# EAGLE board Arduino_Eth08d_MU (EAGLE 5.11)
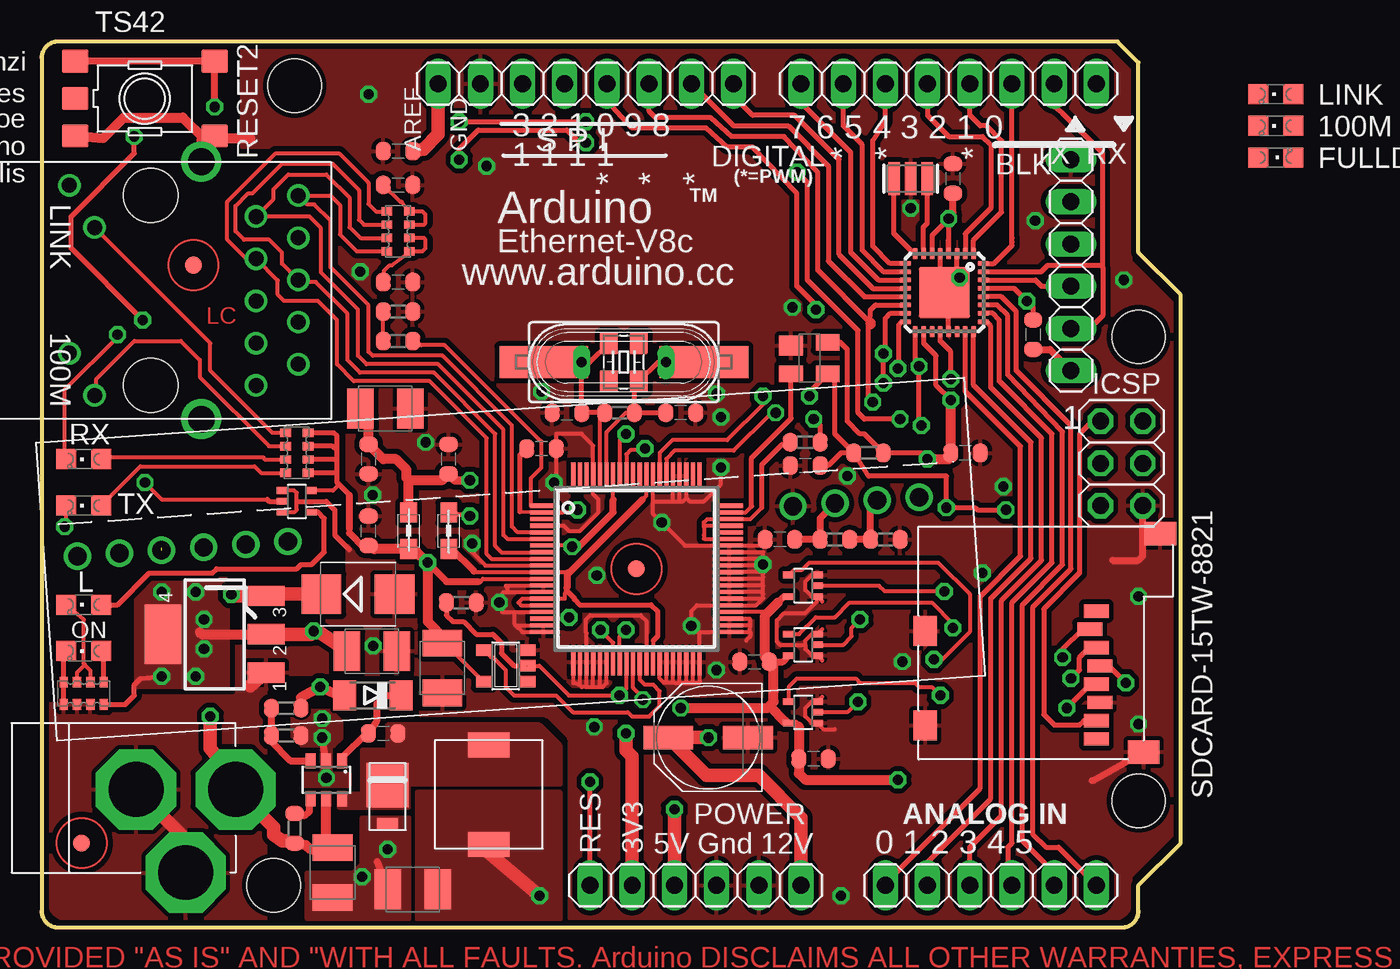
[diagram p0: board, top side]
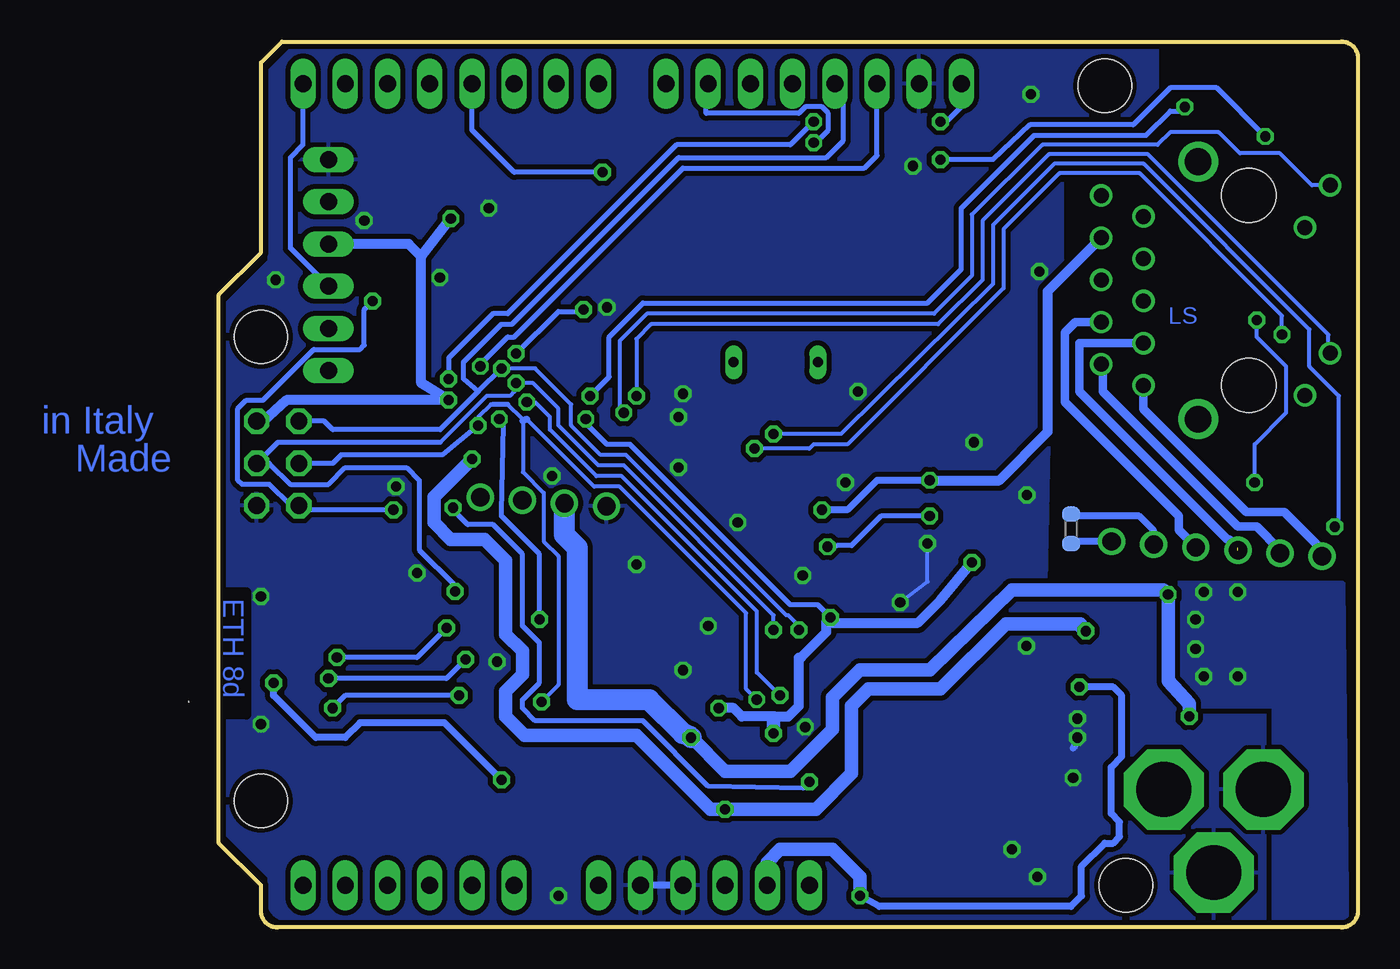
[diagram p1: board, bottom side, seen from below]

Size 68.58 x 53.34 mm. Coordinates in mm from the lower left corner, seen from the top.
Outline: 66.04,2.54 68.58,5.08 68.58,38.1 66.04,40.64 66.04,52.07 64.77,53.34 1,53.34 arc90 0,52.34 0,1 arc90 1,0 65.04,0 arc90 66.04,1 66.04,2.54
Copper layers (1*16): Top 0.035mm / dielectric 1.5mm / Bottom 0.035mm
Design rules "ArduinoDEF": minimum track width 6mil, minimum drill 12mil, track to track 5mil, track to pad 5mil, pad to pad 5mil, via to via 5mil, smd to smd 4mil, copper to edge 10mil, drill to drill 6mil, minimum pad ring 8mil, minimum via ring 8mil, stop-mask expansion 0mil, vias tented up to drill 0mil, thermal gap 10mil
Net classes: 0 default: width 0.152 mm, drill 0.61 mm, clearance 0.152 mm; 1 power: width 0.152 mm, drill 0.61 mm, clearance 0.152 mm; 2 VIN: width 0.61 mm, drill 0.61 mm, clearance 0.305 mm
Holes 3.2 mm at 66.04,35.56 66.04,7.62 15.24,50.67 13.97,2.54
bRestrict: area 66.9,12.8 to 69,20.2

## Footprints (pad centres in the part's own frame; a part is rotated, then mirrored left to right if it is on the bottom)
CHIPLED_0805 = smd 1.2 x 1.2: A 0,-1.05; C 0,1.05
C0603-ROUND = smd 0.898 x 1.1: 1 -0.889,0; 2 0.889,0
SMC_B = smd 1.6 x 2.4: + -1.5,0; - 1.5,0
PANASONIC_D = smd 3 x 1.4: + 2.4,0; - -2.4,0
SMB = smd 2.4 x 2.4: A 2.2,0; C -2.2,0
MINIMELF = smd 1.4 x 1.8: A 1.7,0; C -1.7,0
DO220AAL = smd 2.667 x 2.54: P$1 -0.7,0 | smd 0.762 x 1.27: P$2 1.65,0
SOT143 = smd 1.2 x 1.44: 1 -0.75,-1.1 | smd 1 x 1.44: 2 0.95,-1.1; 3 0.95,1.1; 4 -0.95,1.1
MLF32 = smd 0.7 x 0.3: 1 -2.35,1.75; 2 -2.35,1.25; 3 -2.35,0.75; 4 -2.35,0.25; 5 -2.35,-0.25; 6 -2.35,-0.75; 7 -2.35,-1.25; 8 -2.35,-1.75; 17 2.35,-1.75; 18 2.35,-1.25; 19 2.35,-0.75; 20 2.35,-0.25; 21 2.35,0.25; 22 2.35,0.75; 23 2.35,1.25; 24 2.35,1.75 | smd 0.3 x 0.7: 9 -1.75,-2.35; 10 -1.25,-2.35; 11 -0.75,-2.35; 12 -0.25,-2.35; 13 0.25,-2.35; 14 0.75,-2.35; 15 1.25,-2.35; 16 1.75,-2.35; 25 1.75,2.35; 26 1.25,2.35; 27 0.75,2.35; 28 0.25,2.35; 29 -0.25,2.35; 30 -0.75,2.35; 31 -1.25,2.35; 32 -1.75,2.35 | smd 3.1 x 3.1: PAD 0,0
SC70-5 = smd 0.4 x 0.7: 1 -0.65,-0.85; 2 0,-0.85; 3 0.65,-0.85; 4 0.65,0.85; 5 -0.65,0.85
SOT223 = smd 1.219 x 2.235: 1 -2.311,-3.099; 2 0,-3.099; 3 2.311,-3.099 | smd 3.6 x 2.2: 4 0,3.099
SOT23-6 = smd 0.6 x 0.9: 1 -0.95,-1.15; 2 0,-1.15; 3 0.95,-1.15; 4 0.95,1.15; 5 0,1.15; 6 -0.95,1.15
SQFP-S-10X10-80 = smd 0.25 x 1.6: 1 -3.8,-5.6; 2 -3.4,-5.6; 3 -3,-5.6; 4 -2.6,-5.6; 5 -2.2,-5.6; 6 -1.8,-5.6; 7 -1.4,-5.6; 8 -1,-5.6; 9 -0.6,-5.6; 10 -0.2,-5.6; 11 0.2,-5.6; 12 0.6,-5.6; 13 1,-5.6; 14 1.4,-5.6; 15 1.8,-5.6; 16 2.2,-5.6; 17 2.6,-5.6; 18 3,-5.6; 19 3.4,-5.6; 20 3.8,-5.6; 41 3.8,5.6; 42 3.4,5.6; 43 3,5.6; 44 2.6,5.6; 45 2.2,5.6; 46 1.8,5.6; 47 1.4,5.6; 48 1,5.6; 49 0.6,5.6; 50 0.2,5.6; 51 -0.2,5.6; 52 -0.6,5.6; 53 -1,5.6; 54 -1.4,5.6; 55 -1.8,5.6; 56 -2.2,5.6; 57 -2.6,5.6; 58 -3,5.6; 59 -3.4,5.6; 60 -3.8,5.6 | smd 1.6 x 0.25: 21 5.6,-3.8; 22 5.6,-3.4; 23 5.6,-3; 24 5.6,-2.6; 25 5.6,-2.2; 26 5.6,-1.8; 27 5.6,-1.4; 28 5.6,-1; 29 5.6,-0.6; 30 5.6,-0.2; 31 5.6,0.2; 32 5.6,0.6; 33 5.6,1; 34 5.6,1.4; 35 5.6,1.8; 36 5.6,2.2; 37 5.6,2.6; 38 5.6,3; 39 5.6,3.4; 40 5.6,3.8; 61 -5.6,3.8; 62 -5.6,3.4; 63 -5.6,3; 64 -5.6,2.6; 65 -5.6,2.2; 66 -5.6,1.8; 67 -5.6,1.4; 68 -5.6,1; 69 -5.6,0.6; 70 -5.6,0.2; 71 -5.6,-0.2; 72 -5.6,-0.6; 73 -5.6,-1; 74 -5.6,-1.4; 75 -5.6,-1.8; 76 -5.6,-2.2; 77 -5.6,-2.6; 78 -5.6,-3; 79 -5.6,-3.4; 80 -5.6,-3.8
SOT23-5 = smd 0.69 x 0.99: 1 -0.95,-1.29; 2 0,-1.29; 3 0.95,-1.29; 4 0.95,1.3; 5 -0.95,1.3
2X03 = drill 1.016 octagon: 1 -2.54,-1.27; 2 -2.54,1.27; 3 0,-1.27; 4 0,1.27; 5 2.54,-1.27; 6 2.54,1.27
1X08 = drill 1.016 long: 1 -8.89,0; 2 -6.35,0; 3 -3.81,0; 4 -1.27,0; 5 1.27,0; 6 3.81,0; 7 6.35,0; 8 8.89,0
1X06 = drill 1.016 long: 1 -6.35,0; 2 -3.81,0; 3 -1.27,0; 4 1.27,0; 5 3.81,0; 6 6.35,0
SRR0604 = smd 1.5 x 2.5: P$1 3,0; P$2 -3,0
0805 = smd 1.2 x 1: 1 -1.1,0; 2 1.1,0
QS = drill 0.61 long: 1 -2.54,0; 2 2.54,0
HC49UP = smd 5.334 x 1.93: 1 -4.826,0; 2 4.826,0
CRYSTAL3.2X2.5 = smd 1.3 x 1.1: 1 -1.15,-0.9; 2 1.15,0.9; 3 1.15,-0.9; 4 -1.15,0.9
R0603-ROUND = smd 0.898 x 1.1: 1 -0.889,0; 2 0.889,0
TS42 = smd 1.6 x 1.4: 1 -4.2,2.25; 2 4.2,2.25; 3 -4.2,-2.25; 4 4.2,-2.25; 5 -4.2,0
CAY16 = smd 0.5 x 0.65: 1 -1.2,-0.675; 2 -0.4,-0.675; 3 0.4,-0.675; 4 1.2,-0.675; 5 1.2,0.675; 6 0.4,0.675; 7 -0.4,0.675; 8 -1.2,0.675
POE-RJ45 = drill 1.6 round: CH1 13.94,7.75; CH2 13.94,-7.75 | drill 0.9 round: L1 7.51,-6.325; L2 5.99,-3.785; L3 7.51,3.785; L4 5.99,6.325; R1 19.77,5.715; R2 17.23,4.445; R3 19.77,3.175; R4 17.23,1.905; R5 19.77,0.635; R6 17.23,-0.635; R7 19.77,-1.905; R8 17.23,-3.175; R9 19.77,-4.445; R10 17.23,-5.715 | hole 3.25: 10.89,5.715; 10.89,-5.715
FIDUCIA-MOUNT = smd 1.016 x 1.016: P$1 0,0
DC-21MM = drill 3.302 pad 4.826 octagon: 1 -5.08,-3.353; 2 -0.076,-6.35; 3 -0.076,-0.356
SDCARD-15TW-8821 = smd 0.8 x 1.5: 1 0,0; 2 1.1,-0.4; 3 2.2,0; 4 3.3,0.2; 5 4.4,0; 6 5.5,0.2; 7 6.6,0; 8 7.7,0 | smd 1.4 x 1.9: GND1 -4.66,3.85; GND2 8.49,2.85 | smd 1.8 x 1.4: GND3 1.19,-10.3; GND4 6.89,-10.3
RESONATOR = smd 0.7 x 2: 1 -1,0; 2 0,0; 3 1,0
AG9000 = drill 1.1 round: P$1 0,0; P$2 2.54,0; P$3 5.08,0; P$4 7.62,0; P$5 10.16,0; P$6 12.7,0; P$7 43.18,0; P$8 45.72,0; P$9 48.26,0; P$10 50.8,0

## Placement (x,y rotation side)
100M  Green  [CHIPLED_0805]  74.3,48.26 90 top  (outside the outline)
C1  100n  [C0603-ROUND]  30.1,28.83 0 top
C2  100n  [C0603-ROUND]  21.46,44.7 180 top
C3  100n  [C0603-ROUND]  45.97,27.81 180 top
C4  100n  [C0603-ROUND]  21.46,38.86 180 top
C5  100n  [C0603-ROUND]  21.46,46.74 180 top
C6  100n  [C0603-ROUND]  55.63,28.57 0 top
C7  100n  [C0603-ROUND]  54.86,45.09 90 top
C8  10u  [SMC_B]  19.89,16.64 0 top
C9  22p  [C0603-ROUND]  31.62,30.99 180 top
C10  10n  [C0603-ROUND]  20.57,11.68 0 top
C11  10u  [SMC_B]  17.53,3.3 270 top
C12  22p  [C0603-ROUND]  38.48,30.99 0 top
C13  10u  [SMC_B]  24.13,15.62 270 top
C14  470u  [PANASONIC_D]  40.13,11.43 180 top
C15  1u  [C0603-ROUND]  44.45,23.37 0 top
C16  100n  [C0603-ROUND]  42.93,16 180 top
C17  100n  [C0603-ROUND]  19.68,23.88 90 top
C18  10u  [SMC_B]  22.35,2.29 180 top
C19  10u  [SMC_B]  20.7,31.24 0 top
C20  100n  [C0603-ROUND]  19.68,28.19 270 top
C21  100n  [C0603-ROUND]  24.51,28.19 90 top
C22  1u  [C0603-ROUND]  46.48,10.16 0 top
C23  100n  [C0603-ROUND]  59.69,35.69 270 top
D1  M7  [SMB]  19.05,20.07 0 top
D2  4148  [MINIMELF]  19.94,13.97 180 top
D3  SS1P3L  [DO220AAL]  20.83,7.87 270 top
FULLD  [CHIPLED_0805]  74.3,46.35 270 top  (outside the outline)
IC1  CAT811TTBI-CT3  [SOT143]  46.23,34.29 270 top
IC2  ATMEGA328-20MU  [MLF32]  54.36,38.23 270 top
IC3  74LVC1G125DCK  [SC70-5]  15.37,25.65 270 top
IC4  MC33269ST-5  [SOT223]  10.41,17.65 90 top
IC5  LM2736Y  [SOT23-6]  17.14,8.89 180 top
IC6  W5100  [SQFP-S-10X10-80]  35.81,21.59 270 top
IC10  74LVC1G125DCK  [SC70-5]  45.85,20.57 90 top
IC11  74LVC1G125DCK  [SC70-5]  45.85,12.95 90 top
IC12  74LVC1G125DCK  [SC70-5]  45.85,17.02 90 top
IC13  74LVC1G14DBV  [SOT23-5]  27.94,15.75 90 top
ICSP  ICSP  [2X03]  65.02,27.94 270 top
J1  [1X08]  32.77,50.8 180 top
J2  [1X06]  57.15,2.54 0 top
J3  [1X08]  54.61,50.8 180 top
J4  [1X06]  61.98,39.88 270 top
L  Green  [CHIPLED_0805]  2.54,19.43 90 top
L2  4u7  [SRR0604]  26.92,8 90 top
L3  BLM21  [0805]  24.51,23.88 90 top
L4  BLM21  [0805]  22.1,23.88 270 top
LINK  Yellow  [CHIPLED_0805]  74.3,50.16 90 top  (outside the outline)
ON  Green  [CHIPLED_0805]  2.54,16.64 90 top
POWER  [1X06]  39.37,2.54 0 top
Q1  25MHz  [QS]  35.05,34.04 180 top
Q2  25MHz  [HC49UP]  35.05,34.04 0 top
Q3  25MHz KX-7  [CRYSTAL3.2X2.5]  35.05,34.04 90 top
R1  10k  [R0603-ROUND]  49.78,28.57 0 top
R2  300R 1%  [R0603-ROUND]  21.46,37.08 0 top
R3  12k 1%  [R0603-ROUND]  21.46,35.31 180 top
R4  1M  [R0603-ROUND]  34.8,30.99 0 top
R5  100k  [R0603-ROUND]  15.24,5.97 90 top
R6  16K5  [R0603-ROUND]  14.73,13.21 180 top
R7  10k  [R0603-ROUND]  14.73,11.56 0 top
R8  0R  [R0603-ROUND]  47.75,23.37 0 top
R9  N.M.  [R0603-ROUND]  17.27,24 270 bottom
R10  N.M.  [R0603-ROUND]  50.8,23.37 0 top
R11  10k  [R0603-ROUND]  25.27,19.56 180 top
R12  10k  [R0603-ROUND]  45.97,29.21 0 top
RESET2  TS42  [TS42]  6.22,49.91 0 top
RN1  1k  [CAY16]  2.54,14.1 0 top
RN2  49R9  [CAY16]  21.46,41.91 90 top
RN3  1k  [CAY16]  15.37,28.57 90 top
RX  Yellow  [CHIPLED_0805]  2.54,28.19 90 top
TX  Yellow  [CHIPLED_0805]  2.54,25.4 90 top
U$1  POE-RJ45  [POE-RJ45]  -4.32,38.35 0 top
U$2  FIDUCIALMOUNT  [FIDUCIA-MOUNT]  9.14,39.88 0 top
U$4  FIDUCIALMOUNT  [FIDUCIA-MOUNT]  35.81,21.59 0 top
U$5  FIDUCIALMOUNT  [FIDUCIA-MOUNT]  2.41,5.08 0 top
X1  DC21MMX  [DC-21MM]  5.33,8.38 90 top
X2  SDCARD-15TW-8821  [SDCARD-15TW-8821]  63.5,19.05 270 top
Y1  16Mhz  [RESONATOR]  52.32,45.09 0 top
ZZ1  AG9XX0  [AG9000]  2.16,22.35 4 top

## Library data of the parts
100M FULLD L LINK ON RX TX = led
C1-C7 C9 C10 C12 C15-C17 C20-C23 D3 IC1 IC5 IC6 L2 Q3 R1-R12 U$1 U$2 U$4 U$5 ZZ1 = SmartPrj
C8 C11 C13 C14 C18 C19 = rcl
D1 D2 = diode
IC2 = idii
IC3 IC10-IC12 = 74xx-little-us
IC4 = linear
IC13 = 74xx-little-de
ICSP J1-J4 POWER = pinhead
L3 L4 = wuerth-elektronik
Q1 = special
Q2 = crystal
RESET2 = st-mod v1.4
RN1-RN3 = resistor-dil
X1 = powersupply
X2 = st-mod v1.3
Y1 = Nano_MySMD2

## Nets
5-GND: RESET2.5
+1V8 [power]: IC6.11 IC6.15 IC6.16 IC6.33 IC6.69 L3.1
+1V8A [power]: IC6.7 IC6.74 L3.2
+3V3 [power]: C13.+ C16.1 C17.1 C18.+ C22.1 D2.A IC3.5 IC6.12 IC6.18 IC6.44 IC10.5 IC11.5 IC12.5 IC13.5 L2.P$2 L4.2 POWER.2 R6.1 R12.2 RN3.1 RN3.2 RN3.3 RN3.4 X2.4
+3V3A [power]: C1.1 C19.+ C20.1 C21.1 IC6.2 L4.1 U$1.R3
+5V [power]: C6.1 C7.1 C8.+ IC1.4 IC2.4 IC2.6 IC2.18 IC4.2 IC4.4 ICSP.2 J4.3 POWER.3 R1.2 RN1.4
AREF: C5.1 IC2.20 J1.8
BOOST: C10.1 D2.C IC5.1
COLLLED: IC6.71
EN: IC5.4 R5.2
FB: IC5.3 R6.2 R7.1
FDXLED: IC6.70
GND [power]: C1.2 C2.1 C3.2 C4.1 C5.2 C6.2 C7.2 C8.- C9.2 C11.- C12.2 C13.- C14.- C15.1 C16.2 C17.2 C18.- C19.- C20.2 C21.2 C22.2 D1.A D3.P$2 IC1.1 IC2.3 IC2.5 IC2.21 IC3.1 IC3.3 IC4.1 IC5.2 IC6.4 IC6.10 IC6.13 IC6.14 IC6.17 IC6.19 IC6.20 IC6.21 IC6.22 IC6.23 IC6.24 IC6.25 IC6.26 IC6.32 IC6.34 IC6.35 IC6.36 IC6.37 IC6.38 IC6.39 IC6.40 IC6.41 IC6.42 IC6.43 IC6.45 IC6.46 IC6.47 IC6.48 IC6.49 IC6.50 IC6.51 IC6.52 IC6.53 IC6.54 IC6.63 IC6.64 IC6.65 IC6.68 IC6.77 IC10.1 IC10.3 IC11.1 IC11.3 IC12.1 IC12.3 IC13.3 ICSP.6 J1.7 J4.1 ON.C POWER.4 POWER.5 R2.2 R7.2 R10.2 R11.1 RESET2.3 RESET2.4 RN1.1 RN1.2 RN1.3 RN1.8 U$1.CH1 X1.1 X1.3 X2.6 X2.GND1 X2.GND2 X2.GND3 X2.GND4 Y1.2 ZZ1.P$7
INT: IC6.56
LINKLED: IC6.66 U$1.L4
MISO: IC2.16 IC6.27 ICSP.1 J1.5 X2.7
MOSI: IC2.15 IC6.28 IC10.2 ICSP.4 J1.4
MOSI3: IC10.4 X2.3
N$1: IC3.4 L.A
N$2: RN3.5 U$1.L3
N$3: RN3.6 U$1.L1
N$4: IC2.13 IC3.2 J1.2
N$5: L.C RN1.6 RN1.7
N$8: ON.A RN1.5
N$9: RN3.8 TX.A
N$10: C2.2 RN2.3 RN2.4
N$13: IC2.9 J3.6
N$14: IC2.10 J3.7
N$15: IC2.11 J3.8
N$16: IC2.23 J2.1
N$17: IC2.24 J2.2
N$18: IC2.25 J2.3
N$19: IC2.26 J2.4
N$20: IC2.27 J2.5
N$21: IC2.28 J2.6
N$22: RN3.7 RX.A
N$29: C4.2 RN2.1 RN2.2
N$30: R2.1 R3.2
N$31: IC6.1 R3.1
N$32: R9.1 ZZ1.P$5
N$33: R9.2 ZZ1.P$6
N$34: R8.2 R10.1 ZZ1.P$9
N$36: IC6.55 IC6.57 IC6.58 R12.1
OSC1E: C9.1 IC6.76 Q1.2 Q2.1 Q3.2 R4.1
OSC2E: C12.1 IC6.75 Q1.1 Q2.2 Q3.1 R4.2
PD0: IC2.30 J3.1 J4.4
PD1: IC2.31 J3.2 J4.5
PD2: IC2.32 J3.3
PD3: IC2.1 J3.4
RESET: C3.1 C23.1 IC1.3 IC2.29 ICSP.5 POWER.1 R1.1 RESET2.1 RESET2.2
RESET_W: IC1.2 IC6.59
RTS: C23.2 J4.6
RXIN: IC6.6 RN2.7 U$1.R2
RXIP: IC6.5 RN2.8 U$1.R1
RXLED: IC6.72 RX.C
SCK: IC2.17 IC6.30 IC11.2 ICSP.3 J1.6
SCK3: IC11.4 X2.5
SD_CS: IC2.2 IC12.2 J3.5
SEN: IC6.31 IC13.4
SEN3: IC12.4 X2.2
SPDLED: IC6.67 U$1.L2
SS: IC2.14 IC6.29 IC13.2 J1.3 R11.2
SW [power]: C10.2 D3.P$1 IC5.6 L2.P$1
TXLED: IC6.73 TX.C
TXON: IC6.9 RN2.5 U$1.R4
TXOP: IC6.8 RN2.6 U$1.R5
V1+ [VIN]: U$1.R10 ZZ1.P$1
V1- [VIN]: U$1.R9 ZZ1.P$2
V2+ [VIN]: U$1.R7 ZZ1.P$4
V2- [VIN]: U$1.R8 ZZ1.P$3
VIN [VIN]: C11.+ C14.+ C15.2 D1.C IC4.3 IC5.5 POWER.6 R5.1 R8.1 X1.2 ZZ1.P$8
WOL/IO: IC2.12 J1.1
XTAL1: IC2.7 Y1.3
XTAL2: IC2.8 Y1.1

## Tracks (layer width: path | path; a pad name or v marks a point on that pad's centre or on a via)
+1V8
  Top 0.254: 31.62,20.45 31.59,20.3 31.5,20.07 31.5,19.79 IC6.15 28.93,19.79 28.7,19.56 28.87,19.39 IC6.16 | 36.81,17.26 IC6.33 | 26.04,21.46 26.11,21.39 IC6.11 31.7,21.39 31.75,21.34 | IC6.69 36.41,26 36.16,25.75
  Top 0.305: 31.59,20.3 32.08,19.81 32.08,19.73 32.38,19.43 36.7,19.43 37.08,19.05 37.08,17.53 36.81,17.26
  Top 0.406: 31.62,20.45 31.62,21.34 31.75,21.34 36.16,25.75 | 26.04,21.46 24.64,22.86 24.55,22.86 L3.1
+1V8A  (via drill 0.61)
  Top 0.254: IC6.7 31.62,22.99 31.88,22.99 | 34.41,25.74 IC6.74
  Top 0.305: L3.2 v25.78,24.77
  Top 0.406: 31.88,22.99 v31.94,22.92 32.35,22.92 34.41,24.99 34.41,25.74
  Bottom 0.305: v25.78,24.77 28.7,24.77 30.48,22.99 31.37,22.99 v31.94,22.92
+3V3  (via drill 0.61)
  Top 0.254: IC6.18 31.57,18.59 v31.75,18.67 | IC6.12 26.58,20.99 26.42,20.83 | IC13.5 26.6,14.8 24.64,16.76 24.38,16.74 C13.+ | IC6.44 43.63,18.99 43.56,18.8 | 44.18,14.34 44.18,14.37 44.13,14.41 | IC3.5 17.54,26.3 17.91,26.67
  Top 0.305: v46.48,30.61 46.86,30.23 R12.2 | 44.07,14.22 44.18,14.34 | 44.32,19.56 44.39,19.62 | C16.1 43.88,16.07 | X2.4 64.26,15.75 v65.28,14.73 | 18.53,23.74 18.54,24 | RN3.3 17.51,28.98 17.78,28.7 | 17.78,27.43 17.78,26.8 17.91,26.67 18.54,26.04 | 17.78,27.43 17.78,28.07 | 17.78,28.07 17.78,28.7 | RN3.1 17.72,27.38 17.78,27.43 | RN3.2 17.67,28.18 17.78,28.07 | RN3.4 17.6,29.77 17.78,29.59 17.78,28.7 | 26.29,20.83 26.42,20.83
  Top 0.406: L4.2 21.93,22.9 | 44.07,16 C16.1 44.63,16 IC12.5 | 44.39,19.62 44.69,19.92 IC10.5 | 18.54,24 18.54,26.04 | C17.1 19.41,22.86 18.53,23.74 | 26.29,20.83 24.38,20.83 v23.24,21.97 | 44.77,12.38 44.85,12.3 IC11.5 45.39,12.3 45.59,12.1
  Top 0.61: C13.+ 24.36,17.3 23.24,18.41 v23.24,21.97 22.56,22.65 L4.2 20.02,22.78 C17.1 | v51.56,8.89 45.97,8.89 45.59,9.27 C22.1 45.59,12.1 | 44.32,19.56 43.56,18.8 43.56,16.26 C16.1 | v38.48,13.21 43.69,13.21 43.81,13.34 | 44.07,16 44.07,14.22 44.07,13.59 43.81,13.34 | 43.81,13.34 44.77,12.38 | R6.1 15.62,13.84 v16.76,14.48 17.65,14.1 D2.A
  Top 0.813: v29.97,1.91 26.67,4.7 | POWER.2 35.56,10.29 35.18,10.67 v35.18,11.68
  Bottom 0.305: v31.75,18.67 32.51,19.43 34.16,19.43 43.81,29.08 45.21,29.08 46.48,30.35 v46.48,30.61
  Bottom 0.406: v16.76,14.48 14.73,14.48 14.22,13.97 14.22,10.29 14.86,9.65 14.86,6.86 14.35,6.35 14.35,5.46 14.73,5.08 15.24,5.08 16.64,3.68 16.64,1.91 17.27,1.27 28.83,1.27 v29.97,1.91 | v65.28,14.73 65.28,13.97 62.74,11.43 60.96,11.43 60.07,12.32 54.99,12.32 v51.56,8.89
  Bottom 0.61: v23.24,21.97 25.15,19.68 26.5,18.34 31.67,18.34 v31.75,18.67 32,18.41 32,17.78 33.53,16.26 33.66,16.26 33.66,13.34 34.29,12.7 35.05,12.7 | 35.05,12.7 37.08,12.7 37.59,13.21 v38.48,13.21 | 35.18,12.57 35.05,12.7
  Bottom 0.813: v29.97,1.91 29.97,3.05 31.62,4.7 34.8,4.7 35.56,3.94 POWER.2 | v35.18,11.68 35.18,12.57
  pour Top (no thermals): 31.24,8.13 22.61,8.13 22.61,0.51 31.24,0.51
+3V3A  (via drill 0.61)
  Top 0.254: 28.8,25.02 31.4,24.99 IC6.2 32.5,24.99 32.16,24.99 32.18,25.02
  Top 0.305: 28.8,25.02 28.8,28.47 C1.1
  Top 0.406: v32.26,25.15 32.18,25.02
  Top 0.508: v25.78,26.92 24.89,26.92 C21.1
  Top 0.61: L4.1 22.1,26.95 | 22.1,26.95 24.15,26.95 C21.1 | C19.+ 19.68,30.76 C20.1 20.57,28.19 21.34,28.19 21.97,27.56 21.97,27.07 22.1,26.95
  Bottom 0.406: v32.26,25.15 30.73,25.15 28.96,26.92 v25.78,26.92
  Bottom 0.61: U$1.R3 18.67,38.31 18.67,29.84 21.59,26.92 v25.78,26.92
+5V  (via drill 0.61, 0.61 pad 1.02)
  Top 0.305: IC1.4 48.07,35.24 48.51,34.8 48.51,30.48 49.28,29.72 49.53,29.72 R1.2 52.96,28.57 v53.34,28.19 53.34,28.32 | 54.61,41.41 IC2.4 v54.61,42.67 53.61,41.67 IC2.6 | v7.24,15.11 5.97,14.99 5.59,14.61 5.59,13.97 5.04,13.42 RN1.4 | IC2.18 53.11,35.16 53.85,34.42 53.85,32.64 v54.74,31.75
  Top 0.406: C7.1 54.86,43.05 v54.61,42.67 | 54.61,28.19 C6.1
  Top 0.61: IC4.2 9.65,17.65 9.53,17.78 | C6.1 v54.74,31.75 | v53.34,28.19 54.61,28.19
  Top 0.813: v38.1,7.11 POWER.3 | C8.+ 16.64,17.81 v16.39,17.84 16.2,17.65 IC4.2
  Bottom 0.61: 56.39,40.39 56.39,32.77 v54.74,31.75 64.52,31.75 65.91,30.48 ICSP.2 | 56.39,40.39 v54.61,42.67 | J4.3 57.15,41.15 56.39,40.39
  Bottom 0.813: 16.71,18.29 v16.39,17.84 16.84,18.29 21.21,18.29 25.15,14.35 29.46,14.35 30.48,13.34 30.48,9.27 32.64,7.11 v38.1,7.11 38.99,7.11 43.43,11.56 50.16,11.56 51.31,12.7 51.31,14.22 50.29,15.24 50.29,16.64 51.31,17.65 51.31,22.1 52.58,23.37 54.61,23.37 55.63,24.38 55.63,25.91 v53.34,28.19
  other vias: 9.27,20.19 7.24,20.19 9.27,15.11 9.78,18.54 9.78,16.76
  pour Top (isolate 0.305, no thermals): 5.71,20.95 11.18,21.08 11.18,14.48 5.71,14.48
  pour Bottom (isolate 0.305, no thermals): 0.89,20.7 10.92,20.7 10.92,13.34 5.08,13.34 5.08,-0.64 0.64,-0.64
AREF  (via drill 0.61, 0.61 pad 1.02)
  Top 0.305: v25.15,48.51 v32.77,48.51 | IC2.20 54.11,35.3 54.74,34.67 v54.74,33.02
  Top 0.813: J1.8 23.88,47.75 22.99,46.86 C5.1
  Bottom 0.305: v32.77,48.51 34.16,47.12 41.02,47.12 51.18,36.96 52.07,36.96 54.74,34.29 v54.74,33.02 | v25.15,48.51 24.77,48.51 23.88,49.4 J1.8 | J1.8 23.88,51.18 24,51.31 24,50.93 J1.8
BOOST
  Top 0.305: 18.09,10.09 18.16,10.16 18.16,10.29
  Top 0.406: D2.C 20.7,13.97 20.19,13.46 20.19,12.45 C10.1 19.56,11.68 18.16,10.29 | IC5.1 18.09,10.09
EN
  Top 0.406: R5.2 15.82,6.73 16.13,6.99 16.13,7.67 IC5.4
FB
  Top 0.406: R6.2 R7.1 13.84,11.18 14.98,10.04 IC5.3
GND  (via drill 0.61)
  Top 0.254: IC6.4 31.44,24.19 31.75,23.88 32.41,23.88 33.53,24.99 33.53,25.78 33.21,26.09 IC6.77 33.21,29.02 32.51,29.72 30.99,29.72 C1.2 30.99,26.92 v30.86,26.8 | 28.45,18.99 27.75,18.99 v27.56,19.56 27.81,20.19 28.06,20.19 | 28.45,18.99 IC6.17 | IC6.13 27.96,20.59 27.94,20.57 28.06,20.45 28.06,20.19 | 28.06,20.19 IC6.14 | 28.55,18.19 IC6.19 | 28.55,18.19 28.45,18.29 28.45,18.99 | IC6.20 28.95,17.79 28.55,18.19 | IC6.26 34.01,14.71 33.78,14.48 33.53,14.48 | 32.77,14.48 32.51,14.48 32.41,14.58 | 32.77,14.48 33.27,14.48 | 33.27,14.48 33.53,14.48 | IC6.21 32.01,14.72 32.41,14.58 | 32.41,14.58 IC6.22 | 32.77,14.48 32.81,14.53 IC6.23 32.81,17.73 32.77,17.78 32.77,18.54 33.02,18.8 36.07,18.8 36.41,18.45 IC6.32 | IC6.24 33.21,14.54 33.27,14.48 | IC6.25 33.61,14.56 33.53,14.48 | v39.12,18.16 39.61,17.66 IC6.40 39.62,15.98 39.62,14.73 39.12,14.73 | 37.59,14.73 37.47,14.73 37.21,14.99 IC6.34 | 38.1,14.73 37.59,14.73 | 38.1,14.73 38.35,14.73 | 38.35,14.73 38.86,14.73 | 38.86,14.73 39.12,14.73 | IC6.35 37.61,14.75 37.59,14.73 | IC6.36 38.01,14.82 38.1,14.73 | IC6.37 38.41,14.79 38.35,14.73 | IC6.38 38.81,14.78 38.86,14.73 | IC6.39 39.21,14.83 39.12,14.73 | 42.66,17.79 IC6.41 39.49,17.79 v39.12,18.16 | 42.66,17.79 42.67,17.78 42.67,17.53 42.42,17.27 | 42.66,17.79 42.67,18.29 | 42.67,18.29 42.67,18.54 42.62,18.59 IC6.43 | IC6.42 42.57,18.19 42.67,18.29 | 43.3,22.99 IC6.54 38.73,22.99 v37.34,24.38 36.81,24.91 36.81,25.65 | v43.43,21.84 43.43,22.61 43.42,22.59 IC6.53 | 43.43,20.07 43.43,19.81 43.41,19.79 | 43.41,19.79 43.01,19.39 IC6.45 39.46,19.39 39.12,19.05 v39.12,18.16 | 43.43,20.07 43.43,20.57 | 43.43,20.57 43.43,21.08
  Top 0.254: 43.43,21.08 43.43,21.34 | 43.43,21.34 v43.43,21.84 | IC6.52 43.34,22.19 v43.43,21.84 | IC6.51 43.38,21.79 v43.43,21.84 | IC6.50 43.38,21.39 43.43,21.34 | IC6.49 43.34,20.99 43.43,21.08 | IC6.48 43.42,20.59 43.43,20.57 | IC6.47 43.31,20.19 43.43,20.07 | 43.41,19.79 IC6.46 | 36.81,25.65 IC6.68 | 38.81,25.86 IC6.63 | 38.81,25.86 38.61,25.65 38.35,25.65 | 36.81,25.65 38.1,25.65 | 38.1,25.65 38.35,25.65 | IC6.64 38.41,25.71 38.35,25.65 | IC6.65 38.01,25.74 38.1,25.65 | v40.89,27.69 40.89,26.67 39.88,25.65 39.02,25.65 38.81,25.86 | IC6.10 26.72,21.79 25.91,22.61 v25.91,23.11 | 47,19.62 IC10.1 46.37,19.92 45.97,20.32 45.97,20.83 46.37,21.22 IC10.3 | 47,17.97 IC12.3 46.37,17.67 45.97,17.27 45.97,17.02 | 47,16.07 IC12.1 46.37,16.37 45.97,16.76 45.97,17.02 | 47,13.9 IC11.3 46.37,13.6 45.97,13.21 45.97,12.7 46.37,12.3 IC11.1 47.06,11.94 47.75,11.94 | 46.67,19.62 45.97,18.92 44.7,18.92 44.27,18.49 44.27,17.2 44.45,17.02 45.97,17.02 | IC3.1 15.22,26.3 15.37,26.16 15.37,25.65 15.37,25.15 15.24,25.02 14.53,25.02 IC3.3
  Top 0.305: 18.54,22.73 17.65,23.62 17.65,25.15 17.14,25.65 15.37,25.65 | RN1.1 RN1.8 1.34,16.49 ON.C | IC2.21 54.61,38.45 v55.27,39.12 | IC2.3 55.11,39.28 v55.27,39.12 | IC2.5 54.1,39.24 54.23,39.12 v55.27,39.12
  Top 0.406: X1.3 5.69,8.48 | IC5.2 v16.89,11.43 | C11.- 17.8,1.68 | C18.- 20.22,3.96 | ICSP.6 66.29,22.35 66.04,22.1 64.47,22.1 | 63.25,8.84 X2.GND2
  Top 0.61: RESET2.3 3.72,47.53 4.95,48.77 8.51,48.77 9.78,47.5 9.78,47.53 | 9.78,47.53 RESET2.4 | U$1.CH1 9.62,47.38 9.78,47.53 | 9.78,47.53 12.54,47.53 12.57,47.5
  Top 0.813: X1.1 8.69,5.31 X1.3 5.71,8.33 | 12.57,14.53 IC4.1
  Bottom 0.254: v25.91,23.11 25.91,20.83 v27.56,19.56
  Bottom 0.406: POWER.4 POWER.5 | v16.89,11.43 17.14,10.79
  other vias: 23.11,29.21 19.3,3.05 20.83,4.7 16.89,12.57 17.14,9.02 66.04,12.24 33.43,21.18 40.64,15.49 33.27,12.06 19.96,16.94 57.91,26.54 59.82,42.55 40.89,30.73 66.04,19.94 48.13,1.91 19.94,26.04 19.18,39.5 26.8,45.85 19.68,50.16 30.1,32.26 45.21,37.34 48.51,27.18 52.32,43.31 40.64,32.13 51.82,16 56.64,21.34 65.15,38.99
  pour Bottom (isolate 0.406, no thermals): 14.48,15.24 23.24,15.24 24.51,13.97 24.51,13.72 30.48,13.59 30.48,0.64 14.48,0.76
  pour Top (no thermals): 16,3.3 18.8,3.3 19.3,3.81 19.3,6.6 22.1,6.6 22.1,0.51 16,0.51
  pour Top (no thermals): 15.75,8.51 15.75,9.27 16.89,9.27 16.89,10.92 15.68,10.92 15.11,11.49 15.11,12.95 15.24,13.08 17.4,13.08 18.03,12.45 18.03,11.37 17.59,10.92 17.4,10.92 17.4,9.27 18.54,9.27 18.54,8.51
  pour Top (isolate 0.305, rank 2): 0.51,13.46 5.71,13.46 5.71,20.95 18.41,20.95 18.41,37.34 17.27,37.34 17.27,46.99 12.06,46.99 12.06,53.47 64.26,52.83 65.53,51.56 65.53,40.13 68.07,37.59 68.07,5.59 65.53,3.05 65.53,1.51 arc-90 64.53,0.51 31.75,0.51 31.75,11.43 30.48,12.7 22.86,12.7 22.86,15.24 14.46,15.24 13.46,14.24 13.46,0.51 1.51,0.51 arc-90 0.51,1.51
  pour Bottom (isolate 0.305, rank 2): 17.78,46.99 12.06,46.99 12.06,52.83 64.26,52.83 65.53,51.56 65.53,40.13 68.07,37.59 68.07,5.59 65.53,3.05 65.53,1.51 arc-90 64.53,0.51 1.51,0.51 0.51,1.51 0.76,20.83 18.8,20.7 18.41,37.47 17.78,37.47
LINKLED  (via drill 0.61)
  Top 0.254: IC6.66 37.61,28.22 38.1,28.7 41.66,28.7 43.81,30.86 v44.2,30.99
  Bottom 0.254: v44.2,30.99 44.45,31.24 44.45,35.31 42.8,36.96 25.53,36.96 23.24,39.24 23.24,42.93 18.99,47.12 12.06,47.12 11.3,47.88 8.38,47.88 7.11,46.61 4.7,46.61 2.77,44.68 U$1.L4
MISO  (via drill 0.61)
  Top 0.254: IC6.27 34.41,17.14 v33.66,17.91
  Top 0.305: ICSP.1 63.25,30.48 62.48,29.72 62.48,21.34 60.33,19.18 60.33,12.83 60.96,12.19 62.48,12.19 62.74,12.45 X2.7 | IC2.16 51.8,36.48 51.61,36.27 51.61,33.74 v51.56,33.66
  Bottom 0.254: v33.66,17.91 33.66,18.16 34.29,18.8 34.42,18.8 44.07,28.45 45.59,28.45 47.37,30.23 47.37,31.5 49.53,33.66 v51.56,33.66
  Bottom 0.305: J1.5 31.5,50.42 30.99,49.91 30.99,47.37 32,46.35 40.89,46.35 50.93,36.32 51.56,36.32 53.85,34.04 53.85,33.02 52.96,32.26 | ICSP.1 62.23,30.48 61.72,29.97 55.24,29.97 52.96,32.26 | v51.56,33.66 52.96,32.26
MOSI  (via drill 0.61)
  Top 0.254: v35.18,17.91 34.8,17.53 34.8,16.01 IC6.28 | IC10.2 50.42,20.57 50.76,20.23 v54.36,20.23
  Top 0.305: J1.4 34.04,49.78 35.56,48.13 40.01,48.13 41.27,46.99 42.8,46.99 45.47,44.2 45.47,38.61 46.61,37.47 v46.61,37.21 | v54.36,20.23 54.36,20.32 | IC2.15 51.12,36.98 50.8,36.66 50.8,34.67 v50.67,34.54 v50.67,32.77
  Bottom 0.254: v35.18,17.91 35.18,18.8 44.2,27.81 45.72,27.81 48.13,30.23 48.13,31.24 49.66,32.77 v50.67,32.77 50.8,32.26 51.05,32 52.45,32 55.24,29.21
  Bottom 0.305: v54.36,20.23 54.4,20.61 56.52,22.73 56.52,26.92 57.28,27.69 60.96,27.69 61.98,26.67 64.26,26.67 65.53,27.94 ICSP.4 65.02,29.21 55.24,29.21 | v46.61,37.21 46.74,37.08 48.13,37.08 v50.67,34.54
MOSI3  (via drill 0.61)
  Top 0.254: v53.72,16.13 54.23,16.13 55.88,17.78 55.88,20.07 53.98,21.97 46.23,21.97 45.78,21.52 45.3,21.52 IC10.4
  Top 0.305: X2.3 63.08,16.85 62.48,16.26 62.48,15.49 v61.98,14.99
  Bottom 0.305: v61.98,14.99 54.86,14.99 v53.72,16.13
N$1
  Top 0.305: IC3.4 16.65,25 17.02,24.64 17.02,22.61 16.26,21.84 15.62,21.84 15.37,21.59 10.54,21.59 10.29,21.34 6.48,21.34 4.57,19.43 L.A
N$2
  Top 0.254: U$1.L3 10.16,35.17 10.16,33.53 13.91,29.77 RN3.5
N$3
  Top 0.254: U$1.L1 3.3,32.14 3.3,33.02 5.59,35.31 8.38,35.31 9.53,34.16 9.53,33.15 13.7,28.98 RN3.6
N$4  (via drill 0.61)
  Top 0.254: 13.59,25.78 7.24,25.78 v6.22,26.8
  Top 0.305: IC2.13 49.53,37.98 47.37,40.13 47.37,45.85 44.96,48.26 41.66,48.26 J1.2 | IC3.2 13.72,25.65 13.59,25.78 | v5.59,47.62 5.59,46.61 1.78,42.8 1.78,40.89 v6.1,36.58 | v25.15,46.23 25.15,46.86 26.29,48.01 31.62,48.01 32.38,47.24 v32.77,47.24
  Bottom 0.254: v6.22,26.8 6.22,29.08 4.32,30.99 4.32,33.78 6.1,35.56 6.1,36.07
  Bottom 0.305: v5.59,47.62 8.51,50.55 11.3,50.55 13.53,48.32 19.75,48.32 21.97,46.23 v25.15,46.23 | 6.1,36.07 v6.1,36.58 | J1.2 39.24,50.67 39.24,49.02 33.66,49.02 33.27,49.4 32.26,49.4 31.88,49.02 31.88,48.01 32.64,47.24 v32.77,47.24
N$5
  Top 0.254: L.C 1.65,19.3 2.54,18.54 2.54,15.88 2.6,15.81 | RN1.7 2.14,15.35 2.6,15.81 | RN1.6 2.94,15.47 2.6,15.81
N$8
  Top 0.305: RN1.5 3.74,16.49 ON.A
N$9
  Top 0.254: TX.A 5.95,27.76 12.83,27.76 13.21,27.38 RN3.8
N$10
  Top 0.254: RN2.3 23.01,42.31 23.11,42.42 23.11,42.93 22.93,43.11 RN2.4 21.69,43.69 21.59,43.69 C2.2
N$13
  Top 0.305: J3.6 50.8,48.51 50.04,47.37 50.04,41.02 51.08,39.98 IC2.9
N$14
  Top 0.305: IC2.10 50.69,39.48 49.4,40.77 49.4,47.12 48.26,48.26 J3.7
N$15
  Top 0.305: 45.72,51.21 J3.8 45.72,49.66 48.72,46.66 48.72,40.64 50.38,38.98 IC2.11
N$16
  Top 0.305: J2.1 50.8,2.67 56.52,8.38 56.52,19.94 58.93,22.35 58.93,28.96 55.61,32.28 IC2.23
N$17
  Top 0.305: J2.2 53.34,3.94 57.15,7.75 57.15,19.81 59.56,22.23 59.56,29.21 56.11,32.67 IC2.24
N$18
  Top 0.305: J2.3 55.88,4.83 57.78,6.73 57.78,19.68 60.2,22.1 60.2,29.46 57.15,32.51 57.15,36.2 56.87,36.48 IC2.25
N$19
  Top 0.305: J2.4 58.17,2.79 58.17,4.83 58.42,5.08 58.42,19.56 60.83,21.97 60.83,29.72 57.66,32.89 57.66,36.58 57.26,36.98 IC2.26
N$20
  Top 0.305: J2.5 60.96,3.3 59.05,5.21 59.05,19.43 61.47,21.84 61.47,29.84 58.17,33.27 58.17,36.83 57.52,37.48 IC2.27
N$21
  Top 0.305: J2.6 61.21,4.83 60.45,4.83 59.69,5.59 59.69,19.3 61.98,21.59 61.98,30.23 58.67,33.53 58.67,37.08 57.78,37.98 IC2.28
N$22
  Top 0.254: 3.68,28.19 RX.A 4.1,28.32 13.34,28.32 13.44,28.18 RN3.7
N$29
  Top 0.254: RN2.2 23.01,41.51 23.11,41.4 23.11,40.89 22.93,40.71 RN2.1 22.1,40.64 21.08,39.88 20.95,39.88 20.61,39.54 C4.2
N$30
  Top 0.254: R3.2 R2.1
N$31
  Top 0.254: R3.1 22.86,35.05 24.26,35.05 30.04,29.27 30.1,29.27 30.1,27.69 29.46,27.05 29.46,25.4 29.47,25.39 IC6.1
N$32
  Bottom 0.406: R9.1 17.14,24.77 13.17,24.77 12.29,23.89 ZZ1.P$5
N$33
  Bottom 0.406: ZZ1.P$6 17.15,23.24 R9.2
N$34
  Top 0.406: R8.2 R10.1 49.91,25.33 ZZ1.P$9
N$36
  Top 0.254: 43.36,25.27 42.67,24.59 IC6.58 40.08,24.59 39.88,24.38 39.88,24.13 | 39.9,23.39 IC6.55 | 39.88,23.62 39.9,23.39 | 39.88,24.13 39.88,23.62 | 39.88,23.62 39.88,23.41 39.9,23.39 | IC6.57 39.94,24.19 39.88,24.13
  Top 0.305: 43.36,25.27 43.36,27.86 44.58,29.08 44.83,29.08 R12.1
OSC1E
  Top 0.254: IC6.76 33.61,30.69 R4.1
  Top 0.305: Q1.2 Q2.1 | Q1.2 33,34.04 Q3.2 | Q1.2 C9.1 R4.1
OSC2E
  Top 0.254: IC6.75 34.01,29.82 35.18,30.99 R4.2
  Top 0.305: Q2.2 Q1.1 37.1,34.04 Q3.1 35.69,32.62 R4.2 C12.1
PD0
  Top 0.305: J4.4 60.2,38.61 59.83,38.98 IC2.30
  Bottom 0.305: J3.1 63.5,47.12 64.26,46.35 64.26,40.89 J4.4
PD1
  Top 0.305: J3.2 60.96,49.4 61.47,49.02 63.88,46.61 63.88,39.75 | J4.5 63.12,36.07 63.88,36.83 63.88,39.75 | IC2.31 60.18,39.48 60.58,39.88 63.75,39.88 63.88,39.75
PD2
  Top 0.305: IC2.32 57.34,39.98 58.42,41.05 58.42,41.27 58.42,41.53 J3.3
  Bottom 0.305: J3.3 58.42,49.53
PD3
  Top 0.305: J3.4 55.88,48.9 56.52,48.26 56.9,48.26 57.78,47.37 57.78,43.05 56.11,41.37 IC2.1
RESET  (via drill 0.61)
  Top 0.305: POWER.1 v33.02,8.76 | R1.1 47.75,29.72 47.75,32.92 IC1.3 46.23,32.24 v46.23,32 | v58.06,25.15 56.34,25.15 56.21,25.27 v54.48,25.27 54.48,27.18 49.78,27.18 R1.1 | IC2.29 58.55,38.48 v59.31,37.72 59.69,37.34 C23.1 | C3.1 47.37,27.81 48.13,28.57 R1.1
  Top 0.406: RESET2.1 RESET2.2 10.42,49.92 v10.41,49.4
  Bottom 0.305: v58.06,25.15 63.37,25.15 63.63,25.4 ICSP.5 64.26,25.4 65.53,26.67 67.18,26.67 67.44,26.92 67.44,31.24 66.93,31.75 65.91,31.75 62.87,34.8 60.07,34.8 59.82,35.05 59.82,37.21 v59.31,37.72 | v54.48,25.27 54.61,25.15 54.61,25.27 53.59,24.26 52.07,24.26 50.29,22.48 50.29,18.16 49.28,17.14 49.28,14.73 50.29,13.72 50.29,13.21 49.53,12.45 43.05,12.45 39.12,8.51 33.4,8.38 v33.02,8.76 | v10.41,49.4 10.67,49.15 11.3,49.15 12.76,47.69 19.49,47.69 23.88,43.31 23.88,39.62 25.91,37.59 43.05,37.59 45.09,35.56 45.09,33.15 v46.23,32
RESET_W
  Top 0.254: IC6.59 42.39,24.99 42.75,25.35
  Top 0.305: 42.75,25.35 42.75,28.27 45.13,30.65 IC1.2
RTS
  Top 0.406: C23.2 60.71,34.8 J4.6
RXIN
  Top 0.254: RN2.7 19.2,41.51 18.54,42.16 18.54,43.94 17.14,45.34 14.86,45.34 13.97,44.45 13.97,43.86 U$1.R2 16.13,42.8 16.83,42.1 16.83,39.43 19.05,37.21 19.05,34.42 19.56,33.91 23.88,33.91 27.81,29.97 27.81,23.62 28.05,23.39 IC6.6
RXIP
  Top 0.254: RN2.8 18.98,40.71 17.97,41.72 17.97,43.5 17.4,44.07 U$1.R1 16,43.52 16.43,43.52 17.4,42.55 17.4,39.75 19.68,37.47 19.68,34.67 19.94,34.42 24.13,34.42 28.32,30.23 28.32,24.13 28.66,23.79 IC6.5
RXLED  (via drill 0.61)
  Top 0.254: v4.57,35.69 4.57,35.56 1.4,32.38 1.4,28.29 RX.C | IC6.72 35.21,28.48 35.47,28.74 36.1,28.74 v36.32,28.83
  Bottom 0.254: v36.32,28.83 33.02,28.83 32.77,29.08 30.73,29.08 21.34,38.48 21.34,42.04 17.97,45.4 13.14,45.4 4.57,36.83 v4.57,35.69
SCK  (via drill 0.61)
  Top 0.254: IC6.30 35.61,14.42 36.2,13.84 v36.2,13.72 | v49.15,13.59 48.51,12.95 IC11.2
  Top 0.305: IC2.17 52.61,34.19 52.83,33.91 v52.83,33.78 52.83,30.35 v52.96,30.23
  Bottom 0.229: 49.02,26.16 49.02,25.02
  Bottom 0.254: v36.2,13.72 36.83,14.35 36.83,18.92 44.45,26.54 45.97,26.54 50.04,30.61 50.16,30.61 | v49.15,13.59 48.13,14.61 48.13,22.35 49.02,23.24 49.02,25.02 | 50.16,30.61 50.29,30.61 51.18,31.5 | v52.96,30.23 52.96,30.73 52.2,31.5 52.07,31.5 | 50.16,30.61 | 49.02,26.16 50.27,27.41 50.27,30.5
  Bottom 0.305: J1.6 28.96,46.48 29.72,45.72 40.64,45.72 50.8,35.56 51.18,35.56 52.83,33.91 v52.83,33.78 | ICSP.3 61.72,27.94 61.21,28.45 55.12,28.45 v52.96,30.23 | 51.18,31.5 52.07,31.5
  Bottom 0.406: 50.04,30.61 50.27,30.5
SCK3  (via drill 0.61)
  Top 0.254: v54.1,13.97 53.59,14.48 52.83,14.48 52.58,14.73 49.28,14.73 49.02,14.99 45.47,14.99 45,14.52 IC11.4
  Top 0.305: X2.5 63.16,14.65 v61.72,13.21
  Bottom 0.305: v54.1,13.97 60.96,13.97 v61.72,13.21
SD_CS  (via drill 0.61)
  Top 0.254: v49.28,18.54 48.77,18.03 48.77,17.53 48.26,17.02 IC12.2
  Top 0.305: J3.5 53.34,48.9 54.61,47.62 56.64,47.62 57.15,47.12 57.15,43.31 55.61,41.76 IC2.2 | v51.69,30.61 49.53,30.61 49.15,30.99 49.15,35.94 46.1,38.99 46.1,44.83 v45.47,45.47
  Bottom 0.305: v49.28,18.54 49.28,22.48 51.56,24.77 51.56,25.02 51.44,30.23 51.69,30.48 v51.69,30.61 | v45.47,45.47 50.8,45.47 53.34,48.01 J3.5
SEN
  Top 0.254: IC6.31 36.01,14.91 36.32,14.61 36.83,14.61 37.21,14.22 37.21,13.34 36.58,12.7 35.56,12.7 35.31,12.95 32,12.95 30.99,13.97 28.45,13.97 27.94,14.48 27.94,15.49 27.15,16.29 27.05,16.29 IC13.4
SEN3  (via drill 0.61)
  Top 0.254: v54.86,18.03 54.86,18.29 53.59,19.56 48.64,19.56 47.75,18.67 46.61,18.67 45.61,17.67 IC12.4
  Top 0.305: X2.2 62.65,17.95 61.47,16.76 v61.47,16.26
  Bottom 0.305: v61.47,16.26 56.64,16.26 v54.86,18.03
SPDLED  (via drill 0.61)
  Top 0.254: IC6.67 37.21,28.58 37.97,29.34 41.27,29.34 43.43,31.5 v43.43,32
  Bottom 0.254: v43.43,32 43.43,35.43 42.55,36.32 25.27,36.32 22.61,38.99 22.61,42.55 18.61,46.55 12.64,46.55 1.78,35.69 1.78,34.67
  Bottom 0.305: U$1.L2 1.78,34.67
SS  (via drill 0.61)
  Top 0.254: IC6.29 35.21,14.39 v34.8,13.97 31.75,13.97 29.97,15.75 IC13.2
  Top 0.305: J1.3 36.58,49.15 36.96,48.77 40.26,48.77 41.53,47.62 44.7,47.62 46.74,45.47 46.74,39.57 49.91,36.4 | 49.88,36.32 49.78,36.32 49.78,31.88 v50.04,31.62 | 49.88,36.32 49.91,36.32 | 49.88,36.32 49.89,37.16 50.21,37.48 IC2.14 | R11.2 24.38,18.8 24.77,18.41 25.4,18.41 26.16,17.65 27.18,17.65 27.69,17.14 27.69,16.51 28.45,15.75 IC13.2
  Top 0.61: 49.91,36.32 49.91,36.4
  Bottom 0.254: v50.04,31.62 49.53,31.62 48.64,30.73 48.64,29.97 45.85,27.18 44.32,27.18 36.18,19.04 36.18,15.35 v34.8,13.97
SW
  pour Top (no thermals): 17.91,7.24 22.1,7.24 22.1,8.64 31.24,8.64 31.24,10.92 29.97,12.19 20.83,12.19 20.83,10.67 19.3,10.67 19.3,8 17.91,8
TXLED  (via drill 0.61)
  Top 0.254: v35.18,29.72 34.8,29.34 34.8,27.21 IC6.73 | TX.C 1.49,24.35 v1.4,24.13
  Bottom 0.254: v35.18,29.72 31.11,29.72 21.97,38.73 21.97,42.29 18.29,45.97 12.89,45.97 2.92,36.01 2.92,33.78 1.14,32 1.14,24.38 v1.4,24.13
TXON
  Top 0.254: IC6.9 27.09,22.19 26.8,22.48 26.8,29.46 23.37,32.89 18.8,32.89 17.78,33.91 17.78,36.58 16.64,37.72 14.61,37.72 14.22,38.1 14.22,38.95 U$1.R4 12.32,40.26 11.18,41.4 11.18,43.69 14.1,46.61 17.91,46.61 19.68,44.83 19.68,43.56 20.14,43.11 RN2.5
TXOP
  Top 0.254: IC6.8 27.69,22.59 27.3,22.97 27.3,29.72 23.62,33.4 19.18,33.4 18.41,34.16 18.41,36.96 16.51,38.86 15.58,38.86 U$1.R5 14.48,39.96 14.48,40.64 13.72,41.4 12.19,41.4 11.68,41.91 11.68,43.43 12.45,44.2 12.7,44.2 14.48,45.97 17.53,45.97 19.11,44.39 19.11,42.61 19.41,42.31 RN2.6
V1+
  Bottom 0.508: ZZ1.P$1 2.16,22.73 4.45,25.02 6.73,25.02 12.91,31.2 U$1.R10
V1-
  Bottom 0.508: ZZ1.P$2 4.69,22.73 6.1,24.13 7.24,24.13 15.37,32.26 15.37,33.82 U$1.R9
V2+
  Bottom 0.508: U$1.R7 17.02,36.45 17.65,35.81 17.65,31.62 10.79,24.77 10.79,23.92 ZZ1.P$4
V2-  (1 unrouted)
  Bottom 0.508: U$1.R8 16.76,35.18 16.76,32.26 7.87,23.37 7.75,23.37 7.23,22.84
VIN  (via drill 0.61)
  Top 0.406: C15.2 R8.1 46.86,24.64 ZZ1.P$8
  Top 0.61: R5.1 15.93,4.95 16.23,4.67 C11.+ 17.14,4.8 IC5.5
  Top 0.813: v10.16,12.7 10.16,10.79 11.68,8.89 X1.2 13.97,6.02 13.97,5.59 14.48,5.21 14.73,5.21 R5.1 | POWER.6 45.72,6.6 43.18,9.14 40.02,9.14 C14.+ v40.15,11.43 | D1.C 13.61,20.07 IC4.3 11.51,19.96 v11.43,20.04
  Bottom 0.813: 40.13,11.43 38.1,9.4 34.16,9.4 31.62,11.94 31.62,13.84 29.97,15.49 25.78,15.49 20.83,20.32 11.71,20.32 v11.43,20.04 11.43,14.86 10.16,13.46 v10.16,12.7
  Bottom 1.27: v40.15,11.43 40.13,11.43 40.64,11.68 42.67,13.72 46.99,13.72 46.99,22.86 47.77,23.64 ZZ1.P$8
WOL/IO
  Top 0.305: IC2.12 50.04,38.48 48.01,40.51 48.01,46.23 45.34,48.9 42.8,48.9 41.66,50.04 J1.1
XTAL1
  Top 0.305: IC2.7 53.11,40.87 53.09,40.89 53.09,42.16 53.32,42.4 Y1.3
XTAL2
  Top 0.305: 51.43,44.98 Y1.1 51.31,45.07 51.31,41.78 52.61,40.48 IC2.8

## Text on the board
Top: Arduino(TM) Ethernet Rev 8d | LC | Reference Designs ARE PROVIDED "AS IS" AND "WITH ALL FAULTS. Arduino DISCLAIMS ALL OTHER WARRANTIES, EXPRESS OR IMPLIED, | REGARDING PRODUCTS, INCLUDING BUT NOT LIMITED TO, ANY IMPLIED WARRANTIES OF MERCHANTABILITY OR FITNESS FOR A PARTICULAR PURPOSE | Arduino may make changes to specifications and product descriptions at any time, without notice. The Customer must not | rely on the absence or characteristics of any features or instructions marked "reserved" or "undefined." Arduino reserves | these for future definition and shall have no responsibility whatsoever for conflicts or incompatibilities arising from future changes to them. | The product information on the Web Site or Materials is subject to change without notice. Do not finalize a design with this information. | "ARDUINO" is a registered trademark.
Bottom: LS | in Italy | Made | ETH 8d
tPlace: S P I | DIGITAL | BLK | LINK | Ethernet-V8c | 100M
tNames: M.Banzi | D.Cuartielles | T.Igoe | G.Martino | 3 2 1 0 9 8 | AREF | GND | 7 6 5 4 3 2 1 0 | D.Mellis | 1 1 1 1 | * | * | * | TX | RX | * | * | * | (*=PWM) | TM | Arduino | www.arduino.cc | 1 | ANALOG IN | RES | 3V3 | 5V Gnd 12V | 0 1 2 3 4 5